# EAGLE board CT_schematic (EAGLE 7.6.0)

Size 100 x 80 mm. Coordinates in mm from the lower left corner, seen from the top.
Outline: 0,0 100,0 100,80 0,80 0,0
Copper layers (1*16): Top 0.035mm / dielectric 1.5mm / Bottom 0.035mm
Design rules "default": minimum track width 10mil, minimum drill 24mil, track to track 8mil, track to pad 8mil, pad to pad 8mil, via to via 8mil, smd to smd 8mil, copper to edge 40mil, drill to drill 8mil, minimum pad ring 10mil, minimum via ring 8mil, stop-mask expansion 4mil, vias tented up to drill 0mil, thermal gap 10mil

## Footprints (pad centres in the part's own frame; a part is rotated, then mirrored left to right if it is on the bottom)
C0603 = smd 0.8 x 0.8: 1 -0.762,0; 2 0.762,0
C0402 = smd 0.5 x 0.5: 1 -0.508,0; 2 0.508,0
C0805 = smd 1.2 x 1.3: 1 -1.016,0; 2 1.016,0
2220 = smd 1.85 x 5.5: 1 -2.55,0; 2 2.55,0
EXV-9H = smd 3.505 x 1.676: 1 -2.857,0; 2 2.857,0
L0603 = smd 0.8 x 0.8: 1 -0.762,0; 2 0.762,0
DR1040 = smd 1.6 x 3.2: 1 -4.458,0; 2 4.458,0
PJ-037B_PACKAGE = drill 3.7 square: 1 12,0 | drill 3.2 square: 2 6,0
R0603 = smd 0.8 x 0.8: 1 -0.762,0; 2 0.762,0
LQFP144 = smd 0.35 x 1.35: 1 -8.75,-10.625; 2 -8.25,-10.625; 3 -7.75,-10.625; 4 -7.25,-10.625; 5 -6.75,-10.625; 6 -6.25,-10.625; 7 -5.75,-10.625; 8 -5.25,-10.625; 9 -4.75,-10.625; 10 -4.25,-10.625; 11 -3.75,-10.625; 12 -3.25,-10.625; 13 -2.75,-10.62; 14 -2.25,-10.625; 15 -1.75,-10.625; 16 -1.25,-10.625; 17 -0.75,-10.625; 18 -0.25,-10.625; 19 0.25,-10.625; 20 0.75,-10.625; 21 1.25,-10.625; 22 1.75,-10.625; 23 2.25,-10.625; 24 2.75,-10.62; 25 3.25,-10.625; 26 3.75,-10.625; 27 4.25,-10.625; 28 4.75,-10.625; 29 5.25,-10.625; 30 5.75,-10.625; 31 6.25,-10.625; 32 6.75,-10.625; 33 7.25,-10.625; 34 7.75,-10.625; 35 8.25,-10.625; 36 8.75,-10.625; 73 8.75,10.625; 74 8.25,10.625; 75 7.75,10.625; 76 7.25,10.625; 77 6.75,10.625; 78 6.25,10.625; 79 5.75,10.625; 80 5.25,10.625; 81 4.75,10.625; 82 4.25,10.625; 83 3.75,10.625; 84 3.25,10.625; 85 2.75,10.625; 86 2.25,10.625; 87 1.75,10.625; 88 1.25,10.625; 89 0.75,10.625; 90 0.25,10.625; 91 -0.25,10.625; 92 -0.75,10.625; 93 -1.25,10.625; 94 -1.75,10.625; 95 -2.25,10.625; 96 -2.75,10.625; 97 -3.25,10.625; 98 -3.75,10.625; 99 -4.25,10.625; 100 -4.75,10.625; 101 -5.25,10.625; 102 -5.75,10.625; 103 -6.25,10.625; 104 -6.75,10.625; 105 -7.25,10.625; 106 -7.75,10.625; 107 -8.25,10.625; 108 -8.75,10.625 | smd 1.35 x 0.35: 37 10.625,-8.75; 38 10.625,-8.25; 39 10.625,-7.75; 40 10.625,-7.25; 41 10.625,-6.75; 42 10.625,-6.25; 43 10.625,-5.75; 44 10.625,-5.25; 45 10.625,-4.75; 46 10.625,-4.25; 47 10.625,-3.75; 48 10.625,-3.25; 49 10.625,-2.75; 50 10.625,-2.25; 51 10.625,-1.75; 52 10.625,-1.25; 53 10.625,-0.75; 54 10.625,-0.25; 55 10.625,0.25; 56 10.625,0.75; 57 10.625,1.25; 58 10.625,1.75; 59 10.625,2.25; 60 10.625,2.75; 61 10.625,3.25; 62 10.625,3.75; 63 10.625,4.25; 64 10.625,4.75; 65 10.625,5.25; 66 10.625,5.75; 67 10.625,6.25; 68 10.625,6.75; 69 10.625,7.25; 70 10.625,7.75; 71 10.625,8.25; 72 10.625,8.75; 109 -10.625,8.75; 110 -10.625,8.25; 111 -10.625,7.75; 112 -10.625,7.25; 113 -10.625,6.75; 114 -10.625,6.25; 115 -10.625,5.75; 116 -10.625,5.25; 117 -10.625,4.75; 118 -10.625,4.25; 119 -10.625,3.75; 120 -10.625,3.25; 121 -10.625,2.75; 122 -10.625,2.25; 123 -10.625,1.75; 124 -10.625,1.25; 125 -10.625,0.75; 126 -10.625,0.25; 127 -10.625,-0.25; 128 -10.625,-0.75; 129 -10.625,-1.25; 130 -10.625,-1.75; 131 -10.625,-2.25; 132 -10.625,-2.75; 133 -10.625,-3.25; 134 -10.625,-3.75; 135 -10.625,-4.25; 136 -10.625,-4.75; 137 -10.625,-5.25; 138 -10.625,-5.75; 139 -10.625,-6.25; 140 -10.625,-6.75; 141 -10.625,-7.25; 142 -10.625,-7.75; 143 -10.625,-8.25; 144 -10.625,-8.75
ARDUCAM = drill 1 pad 1.8 square: 1 0,0 | drill 1 pad 1.8: 2 0,2.54; 3 2.54,0; 4 2.54,2.54; 5 5.08,0; 6 5.08,2.54; 7 7.62,0; 8 7.62,2.54; 9 10.16,0; 10 10.16,2.54; 11 12.7,0; 12 12.7,2.54; 13 15.24,0; 14 15.24,2.54; 15 17.78,0; 16 17.78,2.54; 17 20.32,0; 18 20.32,2.54; 19 22.86,0; 20 22.86,2.54
SSOP-28 = smd 1.5 x 0.4: 1 -3.625,4.225; 2 -3.625,3.575; 3 -3.625,2.925; 4 -3.625,2.275; 5 -3.625,1.625; 6 -3.625,0.975; 7 -3.625,0.325; 8 -3.625,-0.325; 9 -3.625,-0.975; 10 -3.625,-1.625; 11 -3.625,-2.275; 12 -3.625,-2.925; 13 -3.625,-3.575; 14 -3.625,-4.225; 15 3.625,-4.225; 16 3.625,-3.575; 17 3.625,-2.925; 18 3.625,-2.275; 19 3.625,-1.625; 20 3.625,-0.975; 21 3.625,-0.325; 22 3.625,0.325; 23 3.625,0.975; 24 3.625,1.625; 25 3.625,2.275; 26 3.625,2.925; 27 3.625,3.575; 28 3.625,4.225
FCI_10118193-0001LF = smd 0.4 x 1.35: 1 -1.3,2.675; 2 -0.65,2.675; 3 0,2.675; 4 0.65,2.675; 5 1.3,2.675 | smd 1.6 x 1.4: 6 -3.2,2.45; 7 3.2,2.45 | smd 1.9 x 1.9: 8 -1.2,0; 9 1.2,0 | hole 0.5: -3.3,0; 3.3,0
TST-110-05-T-D-RA = drill 1 pad 1.7 square: 1 0,0 | drill 1 pad 1.7: 2 0,2.54; 3 2.54,0; 4 2.54,2.54; 5 5.08,0; 6 5.08,2.54; 7 7.62,0; 8 7.62,2.54; 9 10.16,0; 10 10.16,2.54; 11 12.7,0; 12 12.7,2.54; 13 15.24,0; 14 15.24,2.54; 15 17.78,0; 16 17.78,2.54; 17 20.32,0; 18 20.32,2.54; 19 22.86,0; 20 22.86,2.54
WNG008 = smd 0.45 x 0.55: 1 -1.27,0; 2 0,0; 3 1.27,0; 4 2.54,0; 5 2.54,7.5; 6 1.27,7.5; 7 0,7.5; 8 -1.27,7.53 | smd 4.9 x 4.75: PAD 0.635,3.75
SOIC-8 = smd 1.6 x 0.6: 1 -2.7,1.905 | smd 1.55 x 0.6: 2 -2.7,0.635; 3 -2.7,-0.635; 4 -2.7,-1.905; 5 2.7,-1.905; 6 2.7,-0.635; 7 2.7,0.635; 8 2.7,1.905
182-009-MALE = drill 1.194 pad 1.524 octagon: 1 -5.537,10.923; 2 -2.769,10.923; 3 0,10.923; 4 2.769,10.923; 5 5.537,10.923; 6 -4.153,8.08; 7 -1.384,8.08; 8 1.384,8.08; 9 4.153,8.08 | hole 3.048: -12.446,9.501; 12.446,9.501
ABLS-25.000MHZ-B2F-T = smd 5.6 x 2.8: 1 -3.81,0; 2 5.69,0
ASEK = smd 1.4 x 1: 1 -1.1,-0.8; 2 1.1,-0.8; 3 1.1,0.8; 4 -1.1,0.8
ASFL1 = smd 1.7 x 1.5: 1 -1.27,-1.1; 2 1.27,-1.1; 3 1.27,1.1; 4 -1.27,1.1
QFN-16_EP = smd 0.805 x 0.3: 1 -1.452,0.75; 2 -1.452,0.25; 3 -1.452,-0.25; 4 -1.452,-0.75; 9 1.452,-0.75; 10 1.452,-0.25; 11 1.452,0.25; 12 1.452,0.75 | smd 0.3 x 0.805: 5 -0.75,-1.452; 6 -0.25,-1.452; 7 0.25,-1.452; 8 0.75,-1.452; 13 0.75,1.452; 14 0.25,1.452; 15 -0.25,1.452; 16 -0.75,1.452 | smd 1.55 x 1.55: 17 0,0
SON-6 = smd 0.55 x 0.3: 1 -0.355,0.5 | smd 0.52 x 0.3: 2 -0.37,0; 3 -0.37,-0.5; 4 0.37,-0.5; 5 0.37,0; 6 0.37,0.5
SW_4-1437565-2 = smd 1.4 x 2.1: 1 -2.23,4.55; 2 -2.23,-4.55; 3 2.23,4.55; 4 2.23,-4.55
LGM67K-G1J2-24-Z = smd 0.8 x 1.4: A -2,0; C 0,0
NC7SZ125M5X = smd 1.3 x 0.7: 1 -1.3,0.95; 2 -1.3,0; 3 -1.3,-0.95; 4 1.3,-0.95; 5 1.3,0.95

## Placement (x,y rotation side)
C1  1e-06  [C0603]  -50.8,91.44 0 top  (outside the outline)
C2  1e-07  [C0603]  -54.61,91.44 0 top  (outside the outline)
C3  1e-07  [C0603]  -58.42,91.44 0 top  (outside the outline)
C4  1e-07  [C0603]  -62.23,91.44 0 top  (outside the outline)
C5  1e-07  [C0603]  -66.04,91.44 0 top  (outside the outline)
C6  1e-07  [C0603]  -69.85,91.44 0 top  (outside the outline)
C7  1e-07  [C0603]  -73.66,91.44 0 top  (outside the outline)
C8  1e-07  [C0603]  -77.47,91.44 0 top  (outside the outline)
C9  1e-07  [C0603]  -81.28,91.44 0 top  (outside the outline)
C10  1e-07  [C0603]  -85.09,91.44 0 top  (outside the outline)
C11  1e-07  [C0603]  -88.9,91.44 0 top  (outside the outline)
C12  1e-07  [C0603]  -15.24,96.52 0 top  (outside the outline)
C13  1e-07  [C0603]  -19.05,96.52 0 top  (outside the outline)
C14  4.7e-06  [C0603]  -39.37,91.44 0 top  (outside the outline)
C15  2.2e-06  [C0603]  -43.18,91.44 0 top  (outside the outline)
C16  2.2e-06  [C0603]  -46.99,91.44 0 top  (outside the outline)
C17  1e-08  [C0603]  -22.86,96.52 0 top  (outside the outline)
C18  1e-06  [C0603]  -26.67,96.52 0 top  (outside the outline)
C19  1e-07  [C0603]  -30.48,96.52 0 top  (outside the outline)
C20  1e-11  [C0402]  -80.01,96.52 0 top  (outside the outline)
C21  1e-11  [C0402]  -83.82,96.52 0 top  (outside the outline)
C22  1e-06  [C0603]  -34.29,96.52 0 top  (outside the outline)
C23  1e-07  [C0402]  -87.63,96.52 0 top  (outside the outline)
C24  4.7e-06  [C0805]  -21.59,85.09 0 top  (outside the outline)
C25  1e-07  [C0402]  -91.44,96.52 0 top  (outside the outline)
C26  1e-07  [C0402]  -15.24,101.6 0 top  (outside the outline)
C27  1e-07  [C0402]  -19.05,101.6 0 top  (outside the outline)
C28  1e-08  [C0402]  -22.86,101.6 0 top  (outside the outline)
C29  1e-07  [C0402]  -26.67,101.6 0 top  (outside the outline)
C30  1e-07  [C0402]  -30.48,101.6 0 top  (outside the outline)
C31  1e-08  [C0402]  -34.29,101.6 0 top  (outside the outline)
C32  1e-08  [C0402]  -38.1,101.6 0 top  (outside the outline)
C33  1e-08  [C0402]  -41.91,101.6 0 top  (outside the outline)
C34  1e-05  [C0805]  -26.67,85.09 0 top  (outside the outline)
C35  1e-06  [C0603]  -38.1,96.52 0 top  (outside the outline)
C36  1e-07  [C0402]  -45.72,101.6 0 top  (outside the outline)
C37  6.8e-05  [2220]  -16.51,62.23 0 top  (outside the outline)
C38  1e-07  [C0402]  -49.53,101.6 0 top  (outside the outline)
C39  0.0001  [EXV-9H]  -74.93,71.12 0 top  (outside the outline)
C40  0.0001  [EXV-9H]  -86.36,71.12 0 top  (outside the outline)
C41  1e-08  [C0402]  -53.34,101.6 0 top  (outside the outline)
C42  1e-08  [C0402]  -57.15,101.6 0 top  (outside the outline)
C43  1e-08  [C0402]  -60.96,101.6 0 top  (outside the outline)
F1  240.0  [L0603]  -41.91,96.52 0 top  (outside the outline)
I1  3.8e-06  [DR1040]  -38.1,50.8 0 top  (outside the outline)
J1  PJ-037B  [PJ-037B_PACKAGE]  -81.28,30.48 0 top  (outside the outline)
R2  1000.0  [R0603]  -45.72,96.52 0 top  (outside the outline)
R4  4700.0  [R0603]  -49.53,96.52 0 top  (outside the outline)
R5  4700.0  [R0603]  -53.34,96.52 0 top  (outside the outline)
R6  10000.0  [R0603]  -57.15,85.09 0 top  (outside the outline)
R7  10000.0  [R0603]  -62.23,85.09 0 top  (outside the outline)
R8  4700.0  [R0603]  -57.15,96.52 0 top  (outside the outline)
R9  10000.0  [R0603]  -67.31,85.09 0 top  (outside the outline)
R10  10000.0  [R0603]  -72.39,85.09 0 top  (outside the outline)
R11  10000.0  [R0603]  -77.47,85.09 0 top  (outside the outline)
R12  10000.0  [R0603]  -82.55,85.09 0 top  (outside the outline)
R13  10000.0  [R0603]  -87.63,85.09 0 top  (outside the outline)
R14  10000.0  [R0603]  -15.24,91.44 0 top  (outside the outline)
R15  120.0  [R0603]  -60.96,96.52 0 top  (outside the outline)
R16  100000.0  [R0603]  -31.75,85.09 0 top  (outside the outline)
R17  120.0  [R0603]  -64.77,96.52 0 top  (outside the outline)
R18  470000.0  [R0603]  -36.83,85.09 0 top  (outside the outline)
R19  20000.0  [R0603]  -20.32,91.44 0 top  (outside the outline)
R20  91000.0  [R0603]  -25.4,91.44 0 top  (outside the outline)
R21  300000.0  [R0603]  -41.91,85.09 0 top  (outside the outline)
R22  10000.0  [R0603]  -30.48,91.44 0 top  (outside the outline)
R23  10000.0  [R0603]  -35.56,91.44 0 top  (outside the outline)
R24  9100.0  [R0603]  -68.58,96.52 0 top  (outside the outline)
R25  680000.0  [R0603]  -46.99,85.09 0 top  (outside the outline)
R26  120000.0  [R0603]  -52.07,85.09 0 top  (outside the outline)
U1  STM32F746ZGT6  [LQFP144]  -24.13,11.43 0 top  (outside the outline)
U2  arducam_ov2640  [ARDUCAM]  -60.96,76.2 0 top  (outside the outline)
U3  FT232RL-REEL  [SSOP-28]  -60.96,30.48 0 top  (outside the outline)
U4  10118193-0001LF  [FCI_10118193-0001LF]  -59.69,60.96 0 top  (outside the outline)
U5  TST-110-05-T-D-RA  [TST-110-05-T-D-RA]  -46.99,68.58 0 top  (outside the outline)
U6  S25FL128SDPNFI001  [WNG008]  -59.69,48.26 0 top  (outside the outline)
U7  SN65HVD230D  [SOIC-8]  -71.12,50.8 0 top  (outside the outline)
U8  182-009-113R531  [182-009-MALE]  -59.69,6.35 0 top  (outside the outline)
U9  SN65HVD230D  [SOIC-8]  -85.09,50.8 0 top  (outside the outline)
U10  182-009-113R531  [182-009-MALE]  -36.83,29.21 0 top  (outside the outline)
U11  ABLS-25.000MHZ-B2F-T  [ABLS-25.000MHZ-B2F-T]  -26.67,78.74 0 top  (outside the outline)
U12  ASEK-32.768KHz-ECST  [ASEK]  -66.04,71.12 0 top  (outside the outline)
U13  ASFL1-12MHZ-NCS  [ASFL1]  -34.29,60.96 0 top  (outside the outline)
U14  ASFL1-25MHZ-NCS  [ASFL1]  -50.8,60.96 0 top  (outside the outline)
U15  LTC3601EUD#PBF  [QFN-16_EP]  -73.66,96.52 0 top  (outside the outline)
U16  TPS3895ADRYR  [SON-6]  -63.5,100.33 0 top  (outside the outline)
U17  4-1437565-2  [SW_4-1437565-2]  -27.94,50.8 0 top  (outside the outline)
U18  Q65110A2395  [LGM67K-G1J2-24-Z]  -68.58,78.74 0 top  (outside the outline)
U19  nc7sz125m5x  [NC7SZ125M5X]  -80.01,77.47 0 top  (outside the outline)
U20  nc7sz125m5x  [NC7SZ125M5X]  -86.36,77.47 0 top  (outside the outline)
U21  nc7sz125m5x  [NC7SZ125M5X]  -15.24,85.09 0 top  (outside the outline)

## Library data of the parts
C1-C43 F1 I1 J1 R2 R4-R26 U1-U21 = circuit_tree

## Nets
CLK_CRYSTAL_U1_23: C20.1 U1.23 U11.1
CLK_CRYSTAL_U1_24: C21.1 U1.24 U11.2
CLK_U1_8: U1.8 U12.3
CLK_U2_8: U2.8 U14.3
CLK_U3_27: U3.27 U13.3
GND: C1.2 C2.2 C3.2 C4.2 C5.2 C6.2 C7.2 C8.2 C9.2 C10.2 C11.2 C12.2 C13.2 C14.2 C15.2 C16.2 C17.2 C18.2 C19.2 C20.2 C21.2 C22.2 C23.2 C24.2 C25.2 C26.2 C27.2 C28.2 C29.2 C30.2 C31.2 C32.2 C33.2 C34.2 C35.2 C37.1 C37.2 C38.2 C39.2 C40.2 C41.2 C42.2 C43.2 J1.2 R2.2 R6.2 R10.2 R16.2 R18.2 R19.2 R21.2 R24.2 R26.2 U1.16 U1.31 U1.38 U1.51 U1.61 U1.83 U1.94 U1.107 U1.120 U1.130 U2.2 U2.20 U3.7 U3.18 U3.21 U3.25 U3.26 U4.5 U4.6 U4.7 U4.8 U4.9 U5.4 U5.6 U5.8 U5.10 U5.12 U5.14 U5.16 U5.18 U5.20 U6.4 U6.PAD U7.2 U8.5 U9.2 U10.5 U12.2 U13.2 U14.2 U15.1 U15.9 U15.17 U16.2 U18.C U19.2 U19.3 U20.1 U20.3 U21.1 U21.3
NET_U1_25: R4.1 U1.25 U20.4
NET_U1_33: C17.1 C18.1 F1.1 U1.32 U1.33
NET_U1_71: C15.1 U1.71
NET_U1_106: C16.1 U1.106
NET_U1_138: R6.1 U1.138
NET_U1_141: U18.A
NET_U1_142: U17.3 U17.4
NET_U1_143: R7.1 U1.143
NET_U2_19: R5.1 U2.19 U21.4
NET_U3_14: R9.1 U3.14
NET_U3_17: C25.1 U3.17
NET_U3_19: R10.1 U3.19
NET_U4_1: R8.1 U4.1
NET_U4_2: U3.16 U4.2
NET_U4_3: U3.15 U4.3
NET_U4_19: R8.2
NET_U6_3: R12.1 U6.3
NET_U6_7: R14.1 U6.7
NET_U7_6: R15.2 U7.6
NET_U7_8: R16.1 U7.8
NET_U8_2: R15.2 U7.6 U8.2
NET_U8_3: R15.1 U7.7 U8.3
NET_U9_6: R17.2 U9.6
NET_U9_8: R18.1 U9.8
NET_U10_2: R17.2 U9.6 U10.2
NET_U10_3: R17.1 U9.7 U10.3
NET_U15_3: C36.2 I1.1 U15.3 U15.4
NET_U15_6: C36.1 U15.6
NET_U15_7: C35.1 U15.7 U15.12
NET_U15_10: R21.1 U15.10
NET_U15_11: R19.1 R20.1 U15.11
NET_U15_14: U15.14
NET_U15_ATNET_3: I1.2 R20.2
NET_U16_1: R23.1 R24.1 U16.1
NET_U16_3: R25.2 R26.1 U16.3
NET_U16_4: R22.1 U16.4 U19.4 U20.2 U21.2
NET_U17_1: R2.1 U17.1 U17.2
PROC_CAN1_RX: U1.103 U7.4
PROC_CAN1_TX: U1.104 U7.1
PROC_CAN2_RX: U1.73 U9.4
PROC_CAN2_TX: U1.74 U9.1
PROC_DCMI_D0: U1.96 U2.18
PROC_DCMI_D1: U1.97 U2.17
PROC_DCMI_D2: U1.98 U2.16
PROC_DCMI_D3: U1.99 U2.15
PROC_DCMI_D4: U1.3 U2.14
PROC_DCMI_D5: U1.117 U2.13
PROC_DCMI_D6: U1.4 U2.12
PROC_DCMI_D7: U1.5 U2.11
PROC_DCMI_D8: U1.111 U2.10
PROC_DCMI_D9: U1.113 U2.9
PROC_DCMI_HSYNC: U1.40 U2.6
PROC_DCMI_PIXCLK: U1.42 U2.7
PROC_DCMI_VSYNC: U1.124 U2.5
PROC_SPI2_MISO: U1.28 U6.2
PROC_SPI2_MOSI: U1.27 U6.5
PROC_SPI2_NSS: R13.1 U1.134 U6.1
PROC_SPI2_SCK: U1.69 U6.6
PROC_SYS_JTCK_SWCLK: U1.109 U5.9
PROC_SYS_JTDO_SWO: U1.133 U5.13
PROC_SYS_JTMS_SWDIO: U1.105 U5.7
PROC_UART4_CTS: U3.3
PROC_UART4_RTS: U3.11
PROC_UART4_RX: U3.1
PROC_UART4_TX: U3.5
RST_OUT_U5_SRESET_B: R11.1 U5.15 U19.1
VCC_S1_9V0: C34.1 C39.1 C40.1 J1.1 U15.15 U15.16
VCC_TIER1_3V3: C1.1 C2.1 C3.1 C4.1 C5.1 C6.1 C7.1 C8.1 C9.1 C10.1 C11.1 C12.1 C13.1 C14.1 C19.1 C22.1 C23.1 C24.1 C26.1 C27.1 C28.1 C29.1 C30.1 C31.1 C32.1 C33.1 C37.2 C38.1 C41.1 C42.1 C43.1 F1.2 I1.2 R4.2 R5.2 R7.2 R9.2 R11.2 R12.2 R13.2 R14.2 R20.2 R22.2 R23.2 R25.1 U1.6 U1.17 U1.30 U1.39 U1.52 U1.62 U1.72 U1.84 U1.95 U1.108 U1.121 U1.131 U1.144 U2.1 U3.4 U3.20 U5.1 U6.8 U7.3 U9.3 U12.4 U13.4 U14.4 U15.8 U16.6 U19.5 U20.5 U21.5

## Tracks (layer width: path | path; a pad name or v marks a point on that pad's centre or on a via)
CLK_CRYSTAL_U1_23  (2 unrouted)
CLK_CRYSTAL_U1_24  (2 unrouted)
CLK_U1_8  (1 unrouted)
CLK_U2_8  (1 unrouted)
CLK_U3_27  (1 unrouted)
GND  (103 unrouted)
NET_U1_25  (2 unrouted)
NET_U1_33  (4 unrouted)
NET_U1_71  (1 unrouted)
NET_U1_106  (1 unrouted)
NET_U1_138  (1 unrouted)
NET_U1_142  (1 unrouted)
NET_U1_143  (1 unrouted)
NET_U2_19  (2 unrouted)
NET_U3_14  (1 unrouted)
NET_U3_17  (1 unrouted)
NET_U3_19  (1 unrouted)
NET_U4_1  (1 unrouted)
NET_U4_2  (1 unrouted)
NET_U4_3  (1 unrouted)
NET_U6_3  (1 unrouted)
NET_U6_7  (1 unrouted)
NET_U7_6  (1 unrouted)
NET_U7_8  (1 unrouted)
NET_U8_2  (2 unrouted)
NET_U8_3  (2 unrouted)
NET_U9_6  (1 unrouted)
NET_U9_8  (1 unrouted)
NET_U10_2  (2 unrouted)
NET_U10_3  (2 unrouted)
NET_U15_3  (3 unrouted)
NET_U15_6  (1 unrouted)
NET_U15_7  (2 unrouted)
NET_U15_10  (1 unrouted)
NET_U15_11  (2 unrouted)
NET_U15_ATNET_3  (1 unrouted)
NET_U16_1  (2 unrouted)
NET_U16_3  (2 unrouted)
NET_U16_4  (4 unrouted)
NET_U17_1  (2 unrouted)
PROC_CAN1_RX  (1 unrouted)
PROC_CAN1_TX  (1 unrouted)
PROC_CAN2_RX  (1 unrouted)
PROC_CAN2_TX  (1 unrouted)
PROC_DCMI_D0  (1 unrouted)
PROC_DCMI_D1  (1 unrouted)
PROC_DCMI_D2  (1 unrouted)
PROC_DCMI_D3  (1 unrouted)
PROC_DCMI_D4  (1 unrouted)
PROC_DCMI_D5  (1 unrouted)
PROC_DCMI_D6  (1 unrouted)
PROC_DCMI_D7  (1 unrouted)
PROC_DCMI_D8  (1 unrouted)
PROC_DCMI_D9  (1 unrouted)
PROC_DCMI_HSYNC  (1 unrouted)
PROC_DCMI_PIXCLK  (1 unrouted)
PROC_DCMI_VSYNC  (1 unrouted)
PROC_SPI2_MISO  (1 unrouted)
PROC_SPI2_MOSI  (1 unrouted)
PROC_SPI2_NSS  (2 unrouted)
PROC_SPI2_SCK  (1 unrouted)
PROC_SYS_JTCK_SWCLK  (1 unrouted)
PROC_SYS_JTDO_SWO  (1 unrouted)
PROC_SYS_JTMS_SWDIO  (1 unrouted)
RST_OUT_U5_SRESET_B  (2 unrouted)
VCC_S1_9V0  (5 unrouted)
VCC_TIER1_3V3  (72 unrouted)